# Altium PCB Carte_TryOhm_v2.PcbDoc
Units mm, origin at the board's own origin, x right, y up, seen from the top; angles counter-clockwise.
Board outline 36 x 10 mm, 2 copper layers (Component Side, Solder Side), stack 1.57 mm thick; 25 components, 21 nets, 78 pads, 32 vias.
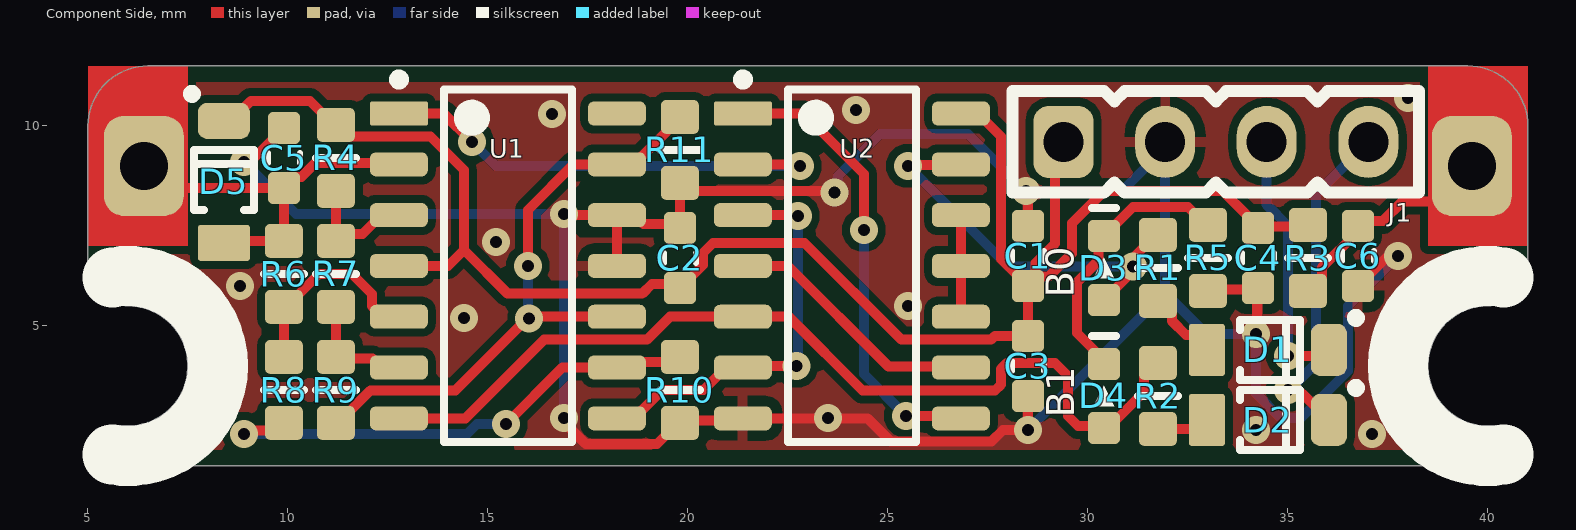
[diagram p0: Component Side view]
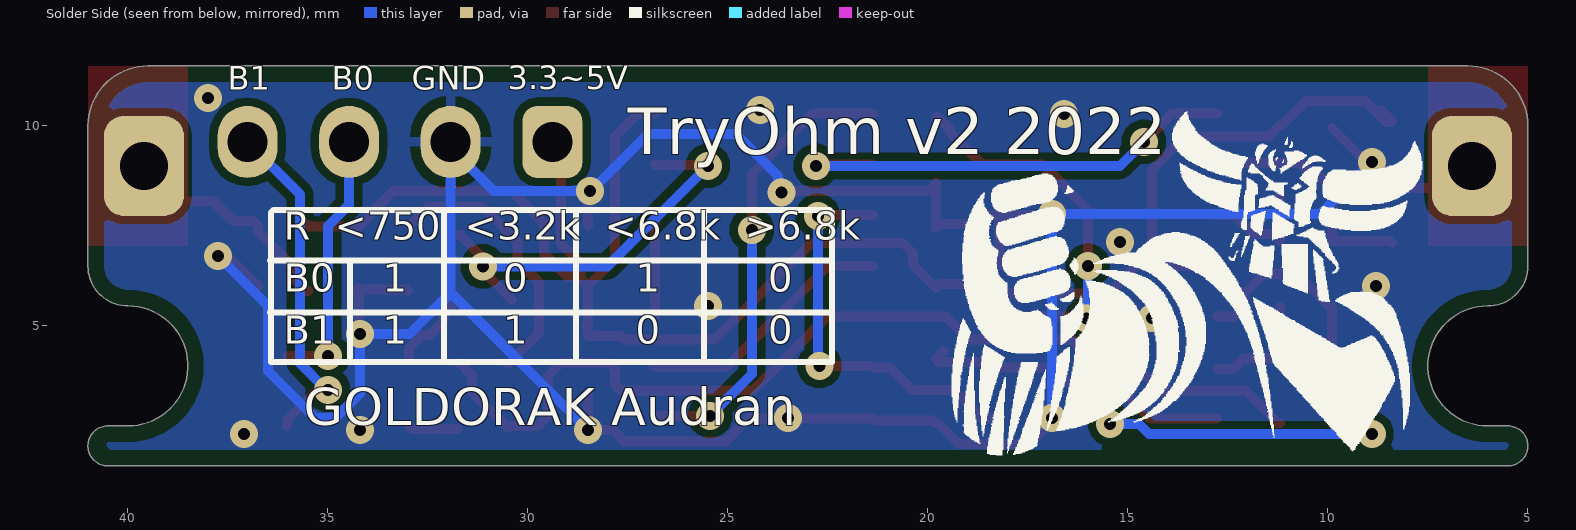
[diagram p1: Solder Side view, seen from below]
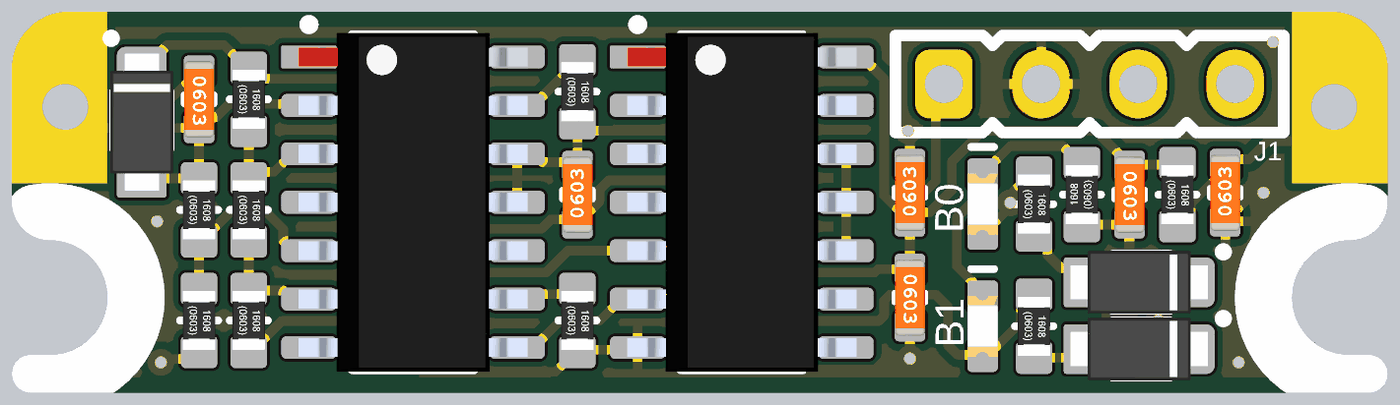
[diagram p2: 3D render of the assembled board from above, using the file's embedded part models]

## Layer stack, top to bottom
Top Solder: solder mask 0.01, Solder Resist, Dk 3.5
Component Side: signal copper 0.035
Dielectric 1: core 1.5, FR-4, Dk 4.8
Solder Side: signal copper 0.035
Bottom Solder: solder mask 0.01, Solder Resist, Dk 3.5

## Board outline
5.5,1.5 cw(c5.5,2) 5.5,2.5 6,2.5 ccw(c6,4) 6,5.5 cw(c6,6.5) 5,6.5 5,10 cw(c6.5,10) 6.5,11.5 39.5,11.5 cw(c39.5,10) 41,10 41,6.5 cw(c40,6.5) 40,5.5 ccw(c40,4) 40,2.5 40.5,2.5 cw(c40.5,2) 40.5,1.5

## Design rules (kind name [scope] priority, off if disabled: settings)
AssemblyTestPointUsage [All] p1 off:
AssemblyTestpoint [All] p1 off: testpointundercomponent=TRUE minsize=1.016 maxsize=2.54 preferedsize=1.524 minholesize=0 maxholesize=1.016 preferedholesize=0.813 testpointgrid=0.025 usegrid=TRUE gridtolerance=0 allowsidetop=TRUE allowsidebottom=TRUE
BoardOutlineClearance [All] p1: gap=0.4 ignorepadtopadclearanceinfootprint=FALSE
Clearance Clearance_polygon [InPolygon] p1: gap=0.2 ignorepadtopadclearanceinfootprint=FALSE except(0: Arc-Hole Track-Hole SMDPad-Hole THPad-Hole Via-Hole Fill-Hole Poly-Hole Region-Hole Text-Hole)
Clearance Clearance_for_power_net [InNetClass('Power') vs InNet('GND')] p2: gap=0.2 ignorepadtopadclearanceinfootprint=TRUE except(0: Arc-Hole Track-Hole SMDPad-Hole THPad-Hole Via-Hole Fill-Hole Poly-Hole Region-Hole Text-Hole)
Clearance Clearance_general [All] p3: gap=0.15 ignorepadtopadclearanceinfootprint=FALSE
ComponentClearance [All] p1: gap=0 collisioncheckmode=3 verticalgap=0 showdistances=FALSE
DiffPairsRouting [All] p1 off: maxlimit=0.254 minlimit=0.127 mostfreqgap=0.254 toplayer_minwidth=0.381 toplayer_maxwidth=0.381 toplayer_prefwidth=0.381 bottomlayer_minwidth=0.381 bottomlayer_maxwidth=0.381 bottomlayer_prefwidth=0.381 maxuncoupledlength=12.7
FabricationTestPointUsage TestPointUsage [All] p1 off: valid=0 allowmultiple=FALSE
FabricationTestpoint Testpoint [All] p1 off: side=3 testpointundercomponent=TRUE minsize=1.016 maxsize=2.54 preferedsize=1.524 minholesize=0 maxholesize=1.016 preferedholesize=0.813 testpointgrid=0.025 allowsidetop=TRUE allowsidebottom=TRUE usegrid=TRUE gridtolerance=0
FanoutControl Fanout_BGA [IsBGA] p1 off: bgadir=Out bgaviamode=Centered fanoutstyle=Auto fanoutdirection=Alternating viagrid=0.025 // Fanout_BGA (Default Rule)
FanoutControl Fanout_LCC [IsLCC] p2 off: bgadir=Out bgaviamode=Centered fanoutstyle=Auto fanoutdirection=Alternating viagrid=0.025 // Fanout_LCC (Default Rule)
FanoutControl Fanout_SOIC [IsSOIC] p3 off: bgadir=Out bgaviamode=Centered fanoutstyle=Auto fanoutdirection=Alternating viagrid=0.025 // Fanout_SOIC (Default Rule)
FanoutControl Fanout_Small [(CompPinCount < 5)] p4 off: bgadir=Out bgaviamode=Centered fanoutstyle=Auto fanoutdirection=OutThenIn viagrid=0.025 // Fanout_Small (Default Rule)
FanoutControl Fanout_Default [All] p5 off: bgadir=Out bgaviamode=Centered fanoutstyle=Auto fanoutdirection=Alternating viagrid=0.025 // Fanout_Default (Default Rule)
Height [All] p1: minheight=0 maxheight=50 prefheight=10
HoleSize [All] p1: absolutevalues=TRUE maxlimit=6.3 minlimit=0.2 maxpercent=80.000 minpercent=20.000
HoleToHoleClearance [All] p1: gap=0.4 allowstackedmicrovias=TRUE
MinimumAnnularRing [All] p1: minimumring=0.076
MinimumSolderMaskSliver [All] p1: minsoldermaskwidth=0.15
MinimumSolderMaskSliver SilkscreenOverComponentPads [All] p2 off: minsoldermaskwidth=0.254
NetAntennae [All] p1 off: netantennaetolerance=0
PlaneClearance [All] p1: clearance=0.5
PlaneConnect [All] p1: planeconnectstyle=Relief reliefexpansion=0.4 reliefentries=4 reliefconductorwidth=0.3 reliefairgap=0.2
PolygonConnect [All] p1: thpad.connectstyle=Relief thpad.reliefconductorwidth=0.25 thpad.reliefentries=4 thpad.polygonreliefangle="90 Angle" thpad.airgapwidth=0.254 smdpad.connectstyle=Relief smdpad.reliefconductorwidth=0.25 smdpad.reliefentries=4 smdpad.polygonreliefangle="90 Angle" smdpad.airgapwidth=0.254 via.connectstyle=Direct via.reliefconductorwidth=0.25 via.reliefentries=4 via.polygonreliefangle="90 Angle" via.airgapwidth=0.254
PolygonConnect PolygonConnect_Via_GND [All vs (InNet('GND') AND  IsVia)] p2: thpad.connectstyle=Relief thpad.reliefconductorwidth=0.25 thpad.reliefentries=4 thpad.polygonreliefangle="90 Angle" thpad.airgapwidth=0.254 smdpad.connectstyle=Relief smdpad.reliefconductorwidth=0.25 smdpad.reliefentries=4 smdpad.polygonreliefangle="90 Angle" smdpad.airgapwidth=0.254 via.connectstyle=Direct via.reliefconductorwidth=0.25 via.reliefentries=4 via.polygonreliefangle="90 Angle" via.airgapwidth=0.254
PolygonConnect PolygonConnect_Via_Power [(InNetClass('Power')  AND  IsVia)] p3: connectstyle=Relief reliefconductorwidth=0.25 reliefentries=4 polygonreliefangle="90 Angle" airgapwidth=0.254
RoutingCorners [All] p1: cornerstyle=45-Degree minsetback=1.5 maxsetback=2.54
RoutingVias [All] p1: holewidth=0.3 width=0.7 viastyle="Through Hole" minholewidth=0.3 minwidth=0.7 maxholewidth=0.3 maxwidth=1
SilkToSilkClearance [All] p1 off: silktosilkclearance=0.1
SolderMaskExpansion [All] p1: expansion=0.075 istentingtop=FALSE
Width [All] p1: maxlimit=15 minlimit=0.127 preferedwidth=0.2
10 further rules are at their usual default settings.

## Classes and differential pairs
net class Logic: 5L C2 D4 D5 GND nC1 nC3 nRB0 RB0
net class Connector: 5L B0 B1 C2 GND NetD1_1 NetD2_1 NetD3_1 RB0 SS_IN SS_OUT
net class Comparator: 1IN_P 2IN_N 2IN_P 3IN_N 3IN_P 5L C2 GND nC1 nC3 NetU1_14 SS_IN

## Components (designator, comment, footprint, x,y, rotation, side; value= is the part's Value field where it differs from the comment)
C1 "4.7uF" "WCAP-CSGP_0603, 1.6x0.8x0.8" 28.5,6.75 r90 top
C2 "100nF" "WCAP-CSGP_0603, 1.6x0.8x0.8" 19.8,6.7 r90 top
C3 "100nF" "WCAP-CSGP_0603, 1.6x0.8x0.8" 28.5,4 r270 top
C4 "100nF" "WCAP-CSGP_0603, 1.6x0.8x0.8" 34.25,6.7 r270 top
C5 "10nF" "WCAP-CSGP_0603, 1.6x0.8x0.8" 9.9,9.2 r270 top
C6 "10nF" "WCAP-CSGP_0603, 1.6x0.8x0.8" 36.75,6.75 r90 top
D1 "RBR3MM40ATFTR" SOD-123FL 34.5,4.4 r0 top value=40V
D2 "RBR3MM40ATFTR" SOD-123FL 34.5,2.65 r0 top value=40V
D3 "150060RS75000" SMCW_0603 30.4,6.45 r270 top value=Rouge
D4 "150060RS75000" SMCW_0603 30.4,3.25 r270 top value=Rouge
D5 "RBR3MM40ATFTR" SOD-123FL 8.4,8.6 r90 top value=40V
J1 "22-03-2041" 22-03-2041 33.2,9.6 r180 top
R1 "RC0603FR-07330RL" RESC1608X06N 31.75,6.45 r270 top value=330
R2 "RC0603FR-07330RL" RESC1608X06N 31.75,3.25 r270 top value=330
R3 "RC0603FR-07100RL" RESC1608X06N 35.5,6.7 r270 top value=100
R4 "RC0603FR-071KL" RESC1608X06N 11.2,9.2 r270 top value=1k
R5 "RC0603FR-071KL" RESC1608X06N 33,6.7 r90 top value=1k
R6 "RC0603FR-07100RL" RESC1608X06N 9.9,6.3 r270 top value=100
R7 "RC0603FR-071KL" RESC1608X06N 11.2,6.3 r270 top value=1k
R8 "RC0603FR-07470RL" RESC1608X06N 9.9,3.4 r270 top value=470
R9 "RC0603FR-07470RL" RESC1608X06N 11.2,3.4 r270 top value=470
R10 "RC0603FR-071KL" RESC1608X06N 19.8,3.4 r270 top value=1k
R11 "RC0603FR-07330RL" RESC1608X06N 19.8,9.4 r270 top value=330
U1 "LMV344IDR" SOIC127P600X175-14N 15.5,6.5 r0 top
U2 "74VHC02MX" SOIC127P600X175-14N 24.1,6.5 r0 top

## Footprints (in the part's own frame and the unit in brackets; to place one, negate y for a bottom-side part, rotate by r counter-clockwise, add the part's x,y. Pads: shape width x height; smd on the part's side, far side on the other; paste and mask are expansions set on the pad)
22-03-2041 [mm]
  rrect50% 1.5x1.8 hole 1: 1(3.81,0)
  oval 1.5x1.8 hole 1: 2(1.27,0) 3(-1.27,0) 4(-3.81,0)
  silkscreen extent -5.08,-1.27 5.08,1.27, body extent -5.08,-1.27 5.08,1.27, height 11.6
RESC1608X06N [mm] "Chip Resistor, 2-Leads, Body 1,6x0,8mm, IPC Medium Density"
  rrect30% 0.85x0.95 smd: 1(-0.825,0) 2(0.825,0)
  silkscreen extent 0,-0.5 0,0.5, body extent -0.78,-0.43 0.78,0.43, height 0.45
SMCW_0603 [mm] "Chip LED, 2-Leads, Body 1.6x0.8mm, IPC Medium Density"
  rrect30% 0.8x0.8 smd: 1(-0.8,0) 2(0.8,0)
  silkscreen extent -1.5,-0.3 0.25,0.3, body extent -0.8,-0.4 0.8,0.4, height 0.7
SOD-123FL [mm] "SOD-123FL"
  rrect15% 0.9x1.3 smd: 1(-1.525,0)
  rrect50% 0.9x1.3 smd: 2(1.525,0)
  silkscreen extent -0.7,-0.75 2.3,0.9, body extent -1.8,-0.83 1.8,0.82, height 0.95
SOIC127P600X175-14N [mm] "SOIC, 14-Leads, Body 8,62x3,90mm, Pitch 1,27mm, IPC Medium Density"
  rrect15% 1.45x0.6 smd: 1(-2.725,3.81)
  rrect50% 1.45x0.6 smd: 2(-2.725,2.54) 3(-2.725,1.27) 4(-2.725,0) 5(-2.725,-1.27) 6(-2.725,-2.54) 7(-2.725,-3.81) 8(2.725,-3.81) 9(2.725,-2.54) 10(2.725,-1.27) 11(2.725,0) 12(2.725,1.27) 13(2.725,2.54) 14(2.725,3.81)
  silkscreen extent -2.85,-4.41 1.6,4.78, body extent -3,-4.44 3,4.45, height 1.7
"WCAP-CSGP_0603, 1.6x0.8x0.8" [mm] "WCAP-CSGP Ceramic Capacitors, size 0603, body 1.6x0.8x0.8"
  rrect30% 0.8x0.8 smd: 1(-0.75,0) 2(0.75,0)
  silkscreen extent -0.13,-0.4 0.13,0.4, body extent -1,-0.39 1,0.39, height 0.8

## Part data
C1: library part "WCAP-CSGP, 885012106012", "CAP CER 4.7UF 10V X5R 0603", Manufacturer="Wurth Elektronik", Manufacturer Part Number=885012106012, RatedVoltage=10V, SUPPLIER PART NUMBER 1=2495148, CeramicType=X5R, ComponentLink1Description=Datasheet, ComponentLink1URL=http://katalog.we-online.com/pbs/datasheet/885012106012.pdf, Size=0603, SUPPLIER 1=Farnell, SUPPLIER 2=JLCPCB, Supplier Footprint 2=0603, SUPPLIER PART NUMBER 2=C19666
C2 C3 C4: library part "WCAP-CSGP, 885012206095", "CAP CER 100nF 50V X7R 0603", Manufacturer="Wurth Elektronik", Manufacturer Part Number=885012206095, RatedVoltage=50V, SUPPLIER PART NUMBER 1=2495187, CeramicType=X7R, ComponentLink1Description=Datasheet, ComponentLink1URL=http://katalog.we-online.com/pbs/datasheet/885012206095.pdf, Size=0603, SUPPLIER 1=Farnell, SUPPLIER 2=JLCPCB, Supplier Footprint 2=0603, SUPPLIER PART NUMBER 2=C14663
C5 C6: library part "WCAP-CSGP, 885012206089", "CAP CER 10nF 50V X7R 0603", Manufacturer="Wurth Elektronik", Manufacturer Part Number=885012206089, RatedVoltage=50V, SUPPLIER PART NUMBER 1=2495182, CeramicType=X7R, ComponentLink1Description=Datasheet, ComponentLink1URL=http://katalog.we-online.com/pbs/datasheet/885012206089.pdf, Size=0603, SUPPLIER 1=Farnell, SUPPLIER 2=JLCPCB, Supplier Footprint 2=0603, SUPPLIER PART NUMBER 2=C57112
D1 D2 D5: "DIODE SCHOTTKY 40V 3A SOD123-FL", ContinuousForwardCurrent=3A, Manufacturer=ROHM, SUPPLIER PART NUMBER 1=2581593, ComponentLink1Description=Datasheet, ComponentLink1URL=http://www.farnell.com/datasheets/2067190.pdf, ComponentLink2Description=Manufacturer, ComponentLink2URL=http://www.rohm.com/web/global/products/-/product/RBR3MM40ATF, Manufacturer Part Number=RBR3MM40ATFTR, SUPPLIER 1=Farnell, SUPPLIER 2=JLCPCB, Supplier Footprint 2=SOD-123, SUPPLIER PART NUMBER 2=C8598, Type=Schottky
D3 D4: library part "WL-SMCW 0603  150060RS75000", "SMD mono-color Chip LED, WL-SMCW, Red", Manufacturer="Wurth Elektronik", SUPPLIER PART NUMBER 1=2322071, ComponentLink1Description=Datasheet, ComponentLink1URL=http://katalog.we-online.com/led/datasheet/150060RS75000.pdf, Manufacturer Part Number=150060RS75000, SUPPLIER 1=Farnell, SUPPLIER 2=JLCPCB, Supplier Footprint 2=LED_0603, SUPPLIER PART NUMBER 2=C72044
J1: "CONN HEADER VERT 4POS 2.54MM", Manufacturer=MOLEX, SUPPLIER PART NUMBER 1=9731091, ComponentLink1Description=Datasheet, ComponentLink1URL=https://www.molex.com/pdm_docs/sd/022032041_sd.pdf, Manufacturer Part Number=22-03-2041, SUPPLIER 1=Farnell
R1 R2 R11: "RES SMD 330 OHM 1% 1/10W 0603", Manufacturer=Yageo, POWER=100mW, SUPPLIER PART NUMBER 1=9238425, ComponentLink1Description=Manufacturer, ComponentLink1URL=http://www.yageo.com/NewPortal/_en/index.jsp, ComponentLink2Description=Datasheet, ComponentLink2URL=http://www.farnell.com/datasheets/2167052.pdf, Manufacturer Part Number=RC0603FR-07330RL, Precision=±1%, SUPPLIER 1=Farnell, SUPPLIER 2=JLCPCB, Supplier Footprint 2=0603, SUPPLIER PART NUMBER 2=C23138, Type="Thick Film", Vmax=50V
R3 R6 R8 R9: library part RC0603FR-07330RL, "RES SMD 330 OHM 1% 1/10W 0603", Manufacturer=Yageo, POWER=100mW, SUPPLIER PART NUMBER 1=9238425, ComponentLink1Description=Manufacturer, ComponentLink1URL=http://www.yageo.com/NewPortal/_en/index.jsp, ComponentLink2Description=Datasheet, ComponentLink2URL=http://www.farnell.com/datasheets/2167052.pdf, Precision=±1%, SUPPLIER 1=Farnell, SUPPLIER 2=JLCPCB, Supplier Footprint 2=0603, Type="Thick Film", Vmax=50V
  R3 R6: Manufacturer Part Number=RC0603FR-07100RL, SUPPLIER PART NUMBER 2=C22775
  R8 R9: Manufacturer Part Number=RC0603FR-07470RL, SUPPLIER PART NUMBER 2=C23179
R4 R5 R7 R10: "RES SMD 1K OHM 1% 1/10W 0603", Manufacturer=Yageo, POWER=100mW, SUPPLIER PART NUMBER 1=9238484, ComponentLink1Description=Manufacturer, ComponentLink1URL=http://www.yageo.com/NewPortal/_en/index.jsp, ComponentLink2Description=Datasheet, ComponentLink2URL=http://www.farnell.com/datasheets/2167052.pdf, Manufacturer Part Number=RC0603FR-071KL, Precision=±1%, SUPPLIER 1=Farnell, SUPPLIER 2=JLCPCB, Supplier Footprint 2=0603, SUPPLIER PART NUMBER 2=C21190, Type="Thick Film", Vmax=50V
U1: "IC OPAMP GP 4 CIRCUIT 14SOIC", Manufacturer="TEXAS INSTRUMENTS", SUPPLIER PART NUMBER 1=3117230, ComponentLink1Description=Datasheet, ComponentLink1URL=https://www.ti.com/lit/ds/symlink/lmv341.pdf, Manufacturer Part Number=LMV344IDR, SUPPLIER 1=Farnell, SUPPLIER 2=JLCPCB, SUPPLIER PART NUMBER 2=C181501
U2: "IC GATE NOR 4CH 2-INP 14SOIC", Manufacturer=ONSEMI, SUPPLIER PART NUMBER 1=2453074, ComponentLink1Description=Datasheet, ComponentLink1URL=https://www.onsemi.com/pdf/datasheet/74vhc02-d.pdf, Manufacturer Part Number=74VHC02MX, SUPPLIER 1=Farnell, SUPPLIER 2=JLCPCB, SUPPLIER PART NUMBER 2=C238963

## Free pads (board coordinates)
  rrect50% 2x2.5 hole 1.2: 2(6.4,9) 2(39.6,9)

## Via types
v1: diameter 0.7, hole 0.3, Component Side to Solder Side, tented both sides, 32 vias

## Nets (pads, with @x,y where several pads share a name; then routed paths per layer and width w, separated by ;. In a path a pad name is that pad's centre, name@x,y a point inside that pad or via, vN(x,y) a via of type N, cw(c..) or ccw(c..) an arc to the next point about the centre after c; other vN are vias at no path point)
1IN_P: R4.2 R7.1 U1.3 | length 3
  Component Side w0.25: R7.1 11.2,7.3 R4.2 ; R7.1@11.225,7.3 11.866,7.3 12.336,7.77 U1.3
2IN_N: R7.2 R9.1 U1.6 | length 2.9
  Component Side w0.25: R7.2 R9.1 11.238,4.187 12.109,4.187 12.368,3.929 U1.6@12.744,3.929
2IN_P: R6.2 R8.1 U1.5 | length 5.1
  Component Side w0.25: R8.1 R6.2 9.95,5.475 10.775,6.3 11.6,6.3 12.1,5.8 12.1,5.494 12.364,5.23 U1.5
3IN_N: R8.2 R10.1 U1.9 | length 13.1
  Component Side w0.25: v1(8.9,2.3) 8.986,2.386 9.711,2.386 R8.2 ; v1(15.45,2.55) 16.86,3.96 U1.9 18.357,4.092 19.717,4.092 19.8,4.175 R10.1@19.615,4.36
  Solder Side w0.25: v1(8.9,2.3) 14.475,2.3 14.725,2.55 v1(15.45,2.55)
3IN_P: R9.2 R11.1 U1.10 U1.13 | length 15.6
  Component Side w0.25: R9.2 11.25,2.575 12.06,3.385 14.185,3.385 v1@16.005,5.205 ; v1(16,6.5) 16,7.9 17.14,9.04 U1.13 18.65,9.04 19.452,9.842 19.452,9.925 19.751,10.225 R11.1 ; v1@16.03,5.23 U1.10
  Solder Side w0.25: v1(16,6.5) 16,5.26 16.03,5.23 v1(16.03,5.18)
5L: C1.1 C2.1 C3.1 C4.1 D5.2 J1.1 R3.1 R4.1 U1.4 U2.14 | length 47.1
  Component Side w0.25: D5.2@8.4,10.1 8.546,10.1 8.749,10.303 9.071,10.625 10.549,10.625 11.149,10.025 R4.1 11.49,9.735 13.565,9.735 14.4,8.9 14.4,6.9 ; D5.2 8.461,10.186 D5.2@8.663,10.388 ; U1.4 14,6.5 14.4,6.9 ; U2.14 27.25,10.31 27.825,9.735 27.825,7.444 27.825,6.675 C1.1 ; C3.1@28.533,5 28.525,5 28.5,5.025 C1.1 ; J1.1 29.175,9.385 29.175,7.056 28.689,6.571 C1.1@28.689,6.189 ; R3.1 35.463,7.487 34.287,7.487 C4.1 33.975,7.725 33.975,7.764 33.364,8.375 30.406,8.375 29.6,7.569 29.6,6.816 29.025,6.241 28.741,6.241 C1.1@28.689,6.189 ; 14.4,6.9 15.495,5.805 18.856,5.805 19.101,6.05 19.7,6.05 C2.1 20.375,6.525 20.375,6.826 20.624,7.075 22.917,7.075 25.337,4.655 27.576,4.655 27.671,4.75 C3.1 ; C3.1 C3.1@28.5,5 ; C3.1 C3.1@28.5,5 ; C3.1 C3.1@28.5,5 ; C1.1 C1.1@28.689,6.189
B0: D1.2 J1.3 | length 6.6
  Component Side w0.25: v1(35,4.25) D1.2@36.025,4.25
  Solder Side w0.25: J1.3 34.47,8.03 35,7.5 v1(35,4.25)
B1: D2.2 J1.4 | length 8.5
  Component Side w0.25: v1(35,3.4) 35.086,3.314 35.357,3.314 36.025,2.646 D2.2@36.025,2.5
  Solder Side w0.25: v1(35,3.4) 35.034,3.4 35.7,4.066 35.7,8.29 J1.4
C2: D4.2 R2.1 U1.7 U2.5 | length 23.5
  Component Side w0.25: U1.7 14.44,2.69 16.405,4.655 18.976,4.655 19.551,5.23 U2.5 22.52,5.23 24.365,3.385 27.679,3.385 27.825,3.531 27.825,3.929 27.971,4.075 29.175,4.075 29.5,3.75 29.5,2.75 29.75,2.5 30.45,2.5 30.5,2.45 31.402,3.352 31.402,3.775 31.701,4.075 R2.1
D4: U2.4 U2.9 | length 6.5
  Component Side w0.25: U2.4 22.5,6.5 25.02,3.98 U2.9@26.845,3.98
D5: U2.1 U2.8 | length 11.5
  Component Side w0.25: U2.1 22.89,10.31 24.4,8.8 v1(24.4,7.4) ; v1(25.447,2.753) 26.762,2.753 U2.8
  Solder Side w0.25: v1(24.4,7.4) 24.4,3.8 v1(25.447,2.753)
GND: C1.2 C2.2 C3.2 C4.2 C5.1 C6.1 J1.2 R5.1 R10.2 R11.2 U1.11 U1.12 U2.7 | length 71.4
  Component Side w0.25: v1(8.9,9.1) 8.986,9.186 9.136,9.186 C5.1 ; v1@16.896,2.6 17.446,2.05 19.224,2.05 19.749,2.575 R10.2 19.857,2.633 21.318,2.633 U2.7 24.487,2.69 25.062,2.115 27.59,2.115 27.875,2.4 v1(28.5,2.4) C3.2 ; v1(16.9,7.8) 16.93,7.77 U1.12 ; U1.11 U1.12 ; C2.2 19.7,7.55 18.884,7.55 18.664,7.77 U1.12 ; C2.2@19.8,7.55 19.8,8.477 R11.2 20,8.375 23.625,8.375 v1(23.663,8.338) ; C1.2 v1@28.5,8.25 ; R5.1 33.037,5.913 34.087,5.913 34.25,5.75 C4.2 ; v1(34.2,4.8) 34.225,4.825 C4.2@34.225,5.713 ; C6.1 37.5,6.75 v1(37.75,6.75)
  Solder Side w0.25: v1(8.9,9.1) 10.2,7.8 v1(16.9,7.8) v1(16.9,2.7) ; v1(23.663,8.338) 23.749,8.424 23.749,8.749 24.8,9.8 27,9.8 28.425,8.375 v1(28.45,8.375) 30.855,8.375 J1.2@31.93,9.45 ; v1(28.5,2.4) 31.93,5.83 ; J1.2 J1.2@31.93,9.45 ; v1(37.75,6.75) 36.5,5.5 36.5,3.875 35.325,2.7 34.816,2.7 34.2,3.316 v1(34.2,4.8) 32.96,4.8 31.93,5.83 ; 31.93,5.83 J1.2@31.93,9.45
  other v1: 37.1,2.3 34.2,2.4 23.5,2.7 14.4,5.2 25.5,5.5 8.8,6 15.2,7.1 16.6,10.3 24.2,10.4 38,10.7
nC1: U1.1 U2.2 | length 12
  Component Side w0.25: U1.1 12.779,10.314 13.886,10.314 v1(14.6,9.6) ; U2.2 22.76,9.04 v1(22.8,9)
  Solder Side w0.25: v1(14.6,9.6) 15.2,9 v1(22.8,9)
nC3: U1.8 U2.3 U2.6 | length 10.2
  Component Side w0.25: U1.8 18.65,2.69 19.36,3.4 20.39,3.4 20.95,3.96 U2.6 21.415,4 v1(22.714,4) ; U2.3 22.73,7.77 v1(22.75,7.75)
  Solder Side w0.25: v1(22.714,4) 22.75,4.036 v1(22.75,7.75)
NetD1_1: D1.1 R1.2 | length 2
  Component Side w0.25: R1.2 31.799,5.625 32.098,5.325 32.098,5.128 32.451,4.775 32.65,4.775 32.975,4.45 D1.1@32.975,4.25
NetD2_1: D2.1 R2.2 | length 1.3
  Component Side w0.25: R2.2 32.9,2.425 D2.1@32.975,2.5
NetD3_1: D3.1 D4.1 R5.2 | length 6.9
  Component Side w0.25: D4.1@30.5,4.05 29.725,4.825 29.725,6.094 30.261,6.629 30.261,7.111 30.675,7.525 31.125,7.975 32.499,7.975 32.949,7.525 R5.2
nRB0: U2.10 U2.11 U2.12 | length 2.5
  Component Side w0.25: U2.10 U2.11 U2.12
RB0: D3.2 R1.1 U2.13 | length 10.3
  Component Side w0.25: v1(25.5,9) 25.52,9.02 26.805,9.02 U2.13 ; D3.2 31.126,6.376 v1(31.126,6.486) ; v1@31.145,6.447 31.212,6.514 31.212,6.786 31.701,7.275 R1.1
  Solder Side w0.25: v1(25.5,9) 28.014,6.486 v1(31.126,6.486)
SS_IN: C5.2 D5.1 pad.2@6.4,9 R6.1 U1.2 | length 9.7
  Component Side w0.25: pad.2@6.4,9 6.95,8.45 C5.2 ; D5.1 8.45,7.125 R6.1 C5.2 ; U1.2 12.736,9.079 10.689,9.079 10.336,8.725 10.175,8.725 C5.2
SS_OUT: C6.2 pad.2@39.6,9 R3.2 | length 5.6
  Component Side w0.25: R3.2 35.549,5.875 35.848,6.175 35.848,6.459 36.75,7.361 C6.2 36.879,7.629 37.379,7.629 37.856,8.106 38.754,8.106 39.5,8.853 pad.2@39.5,9
pads on no net: U1.14

## Polygon pours and split planes (outlines as drawn)
GND on Component Side "NONET_L-01_P-001" (solid, pour order 1): 5.5,1.5 cw(c5.5,2) 5.5,2.5 6,2.5 ccw(c6,4) 6,5.5 cw(c6,6.5) 5,6.5 5,10 cw(c6.5,10) 6.5,11.5 39.5,11.5 cw(c39.5,10) 41,10 41,6.5 cw(c40,6.5) 40,5.5 ccw(c40,4) 40,2.5 40.5,2.5 cw(c40.5,2) 40.5,1.5
GND on Solder Side "NONET_L-01_P-001" (solid, pour order 0): 5.5,1.5 cw(c5.5,2) 5.5,2.5 6,2.5 ccw(c6,4) 6,5.5 cw(c6,6.5) 5,6.5 5,10 cw(c6.5,10) 6.5,11.5 39.5,11.5 cw(c39.5,10) 41,10 41,6.5 cw(c40,6.5) 40,5.5 ccw(c40,4) 40,2.5 40.5,2.5 cw(c40.5,2) 40.5,1.5

## Other copper
Component Side:
  rectangle net SS_OUT: 38.5,7 41,11.5
  rectangle net SS_IN: 5,7 7.5,11.5
  pour cut-out: 17.25,8.5 20.5,8.5 20.925,8.075 20.925,7.275 20.858,7.208 17.292,7.208 17,7.5 17,8.25

## Silkscreen, mask and mechanical layers (free items; w line width, h text height)
Top Overlay:
  lines w1.5: 5.609,1.784 ccw(c6,4) 5.609,6.216 ; 40.391,1.784 cw(c40,4) 40.391,6.216
  text "B0" at 29.888,5.7 h1.2 r90
  text "B1" at 29.9,2.7 h1.2 r90
Bottom Overlay:
  drawing of 62 lines, arcs and shapes, not listed
  text "3.3~5V" at 30.5,10.711 h1
  text "GND" at 32.9,10.71 h1
  text "B0" at 34.9,10.71 h1
  text "B1" at 37.5,10.7 h1
  text "TryOhm v2 2022" at 27.5,8.9 h2
  text "R  <750  <3.2k  <6.8k  >6.8k" at 36.1,6.913 h1.2
  text "B0    1        0         1         0" at 36.1,5.612 h1.2
  text "B1    1        1         0         0" at 36.1,4.312 h1.2
  text "GOLDORAK Audran" at 35.6,2.2 h1.6
Top Solder:
  region: 41,11.5 38.5,11.5 38.5,7 41,7
  rectangle: 5,7 7.5,11.5
Board Outline:
  the board outline again, w0.1

## Dimensions
5.5,1.5 to 6.5,11.5 on Dimension
5,6.5 to 41,6.5 on Dimension

## Text inside footprints (layer, text, board x,y; h text height)
D3: Top 3D Body "K" at 30.1,7.95 h1 r270
D4: Top 3D Body "K" at 30.1,4.75 h1 r270